# Altium PCB MainPCBV6.PcbDoc (part 1 of 5)
Units mm, origin at the board's own origin, x right, y up, seen from the top; angles counter-clockwise.
Board outline 176 x 144.01 mm, 2 copper layers (Top Layer, Bottom Layer); 232 components, 243 nets, 937 pads, 277 vias.
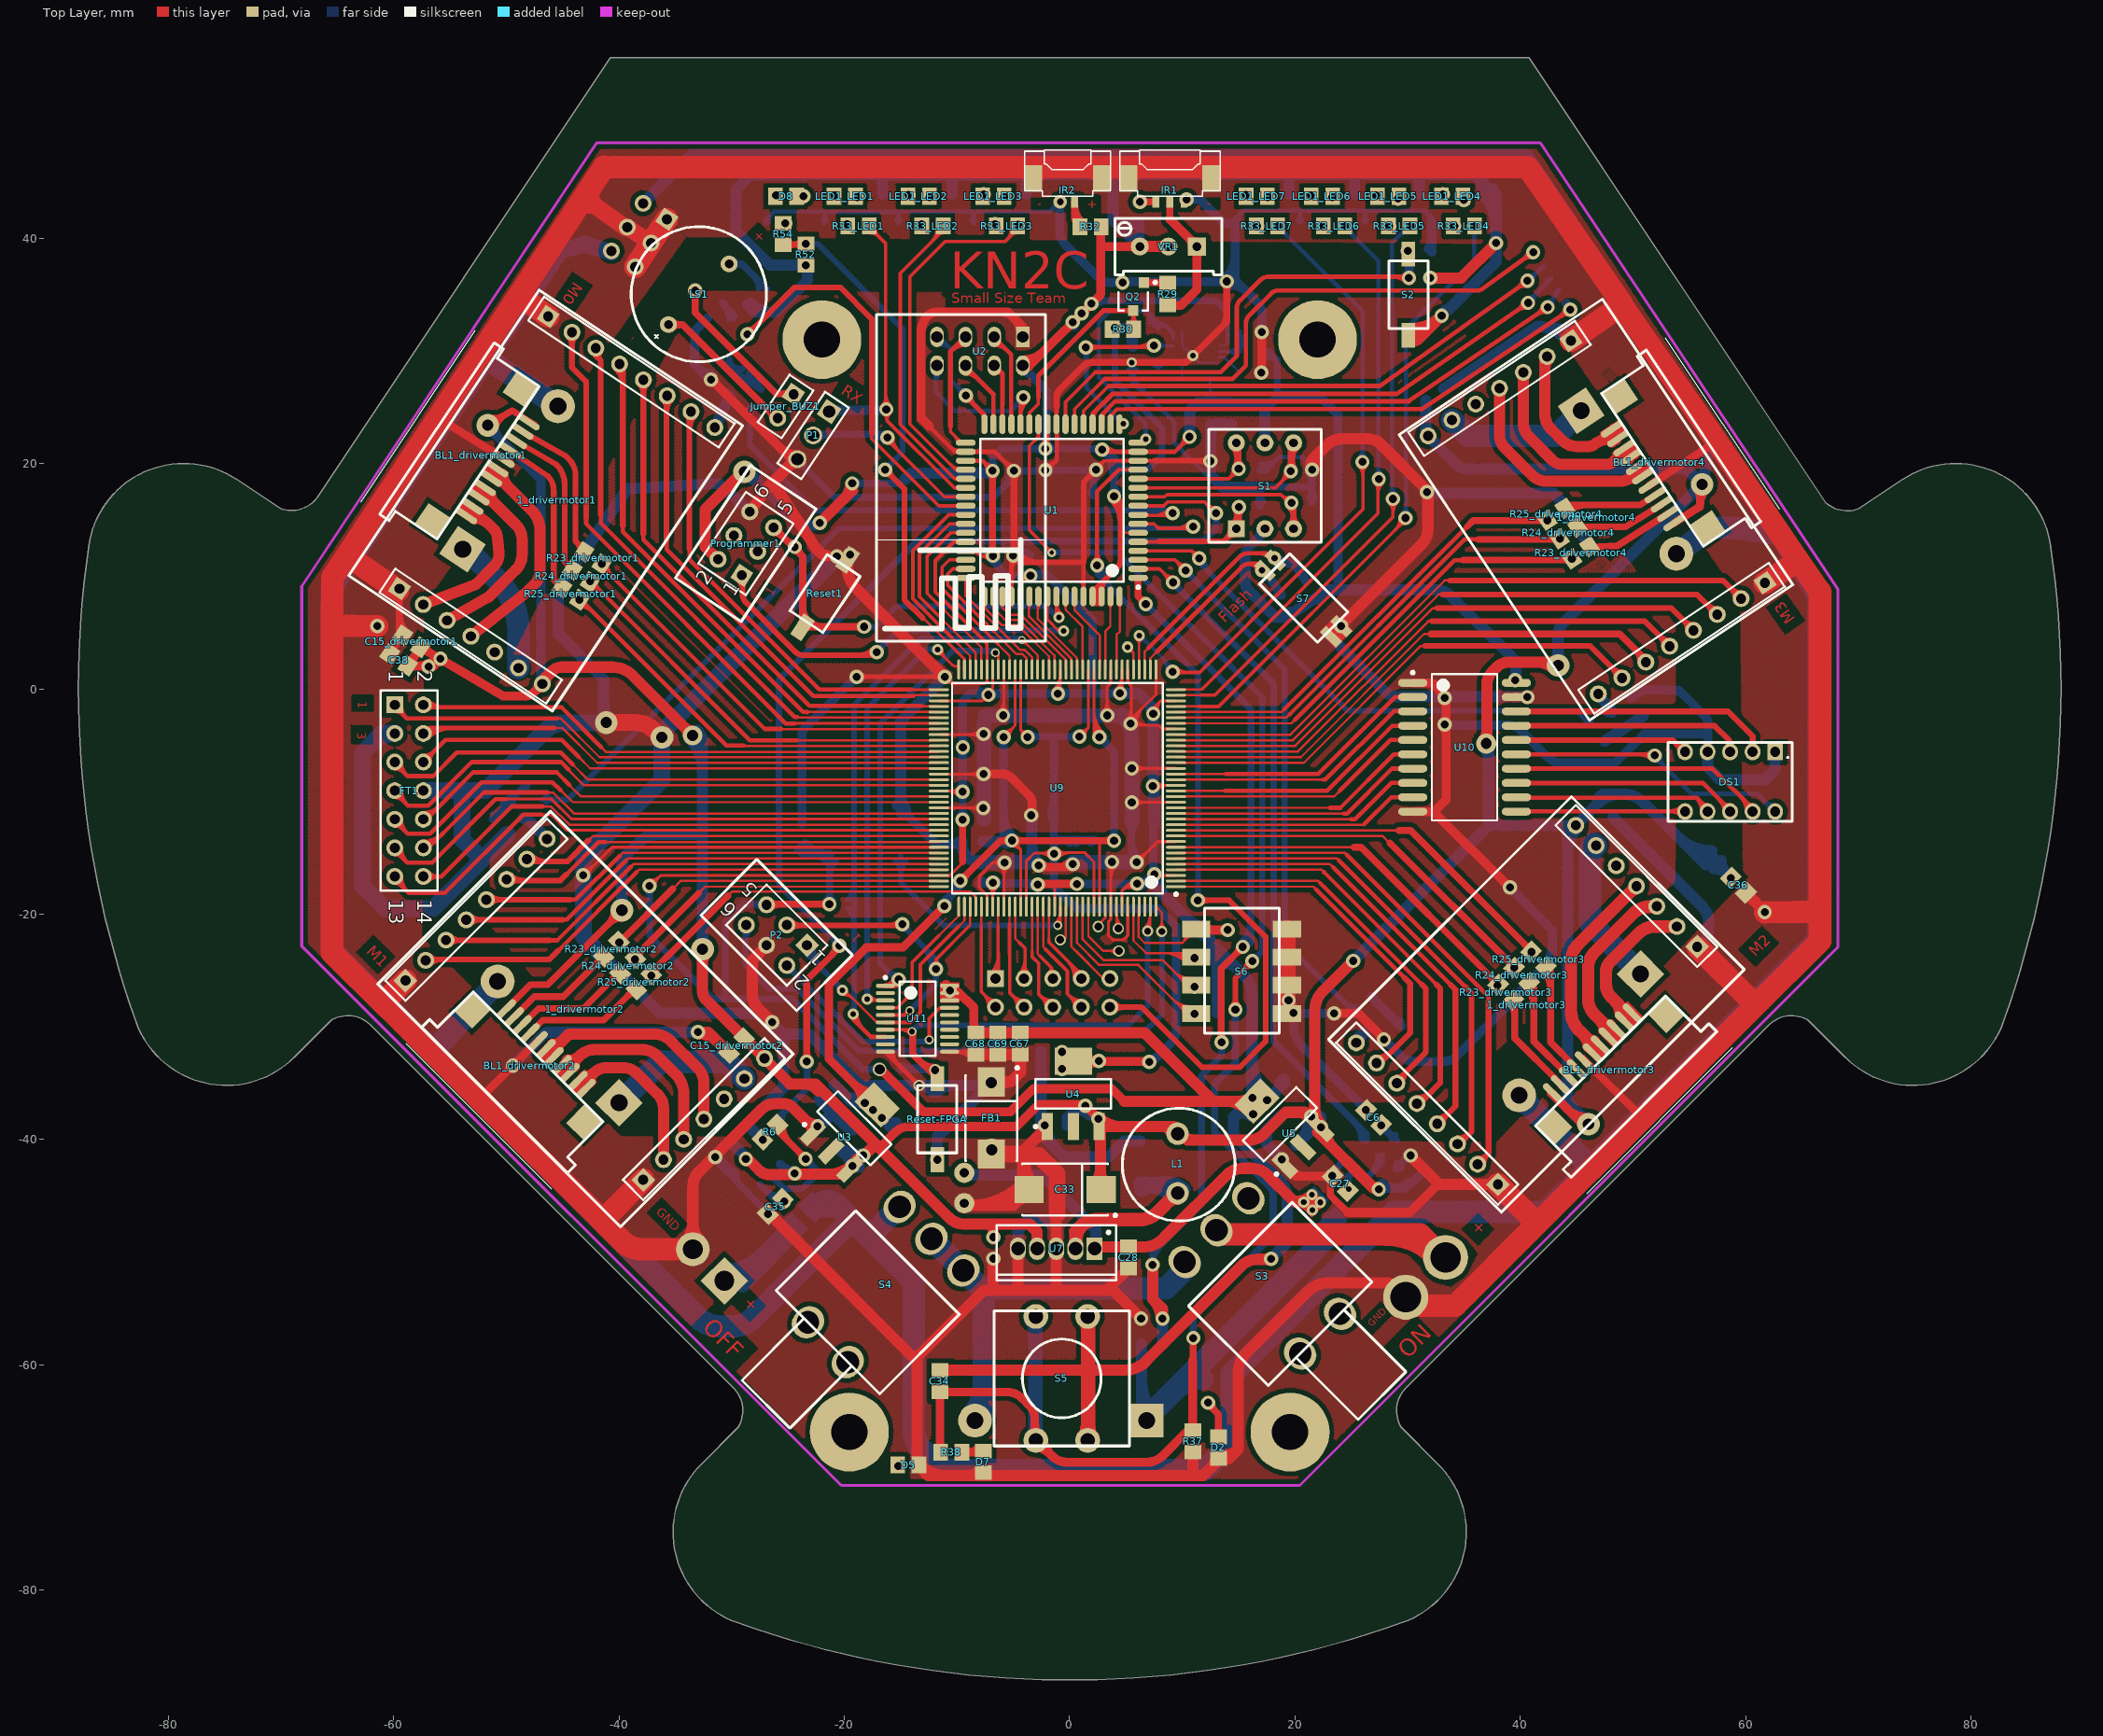
[diagram p0: Top Layer view]
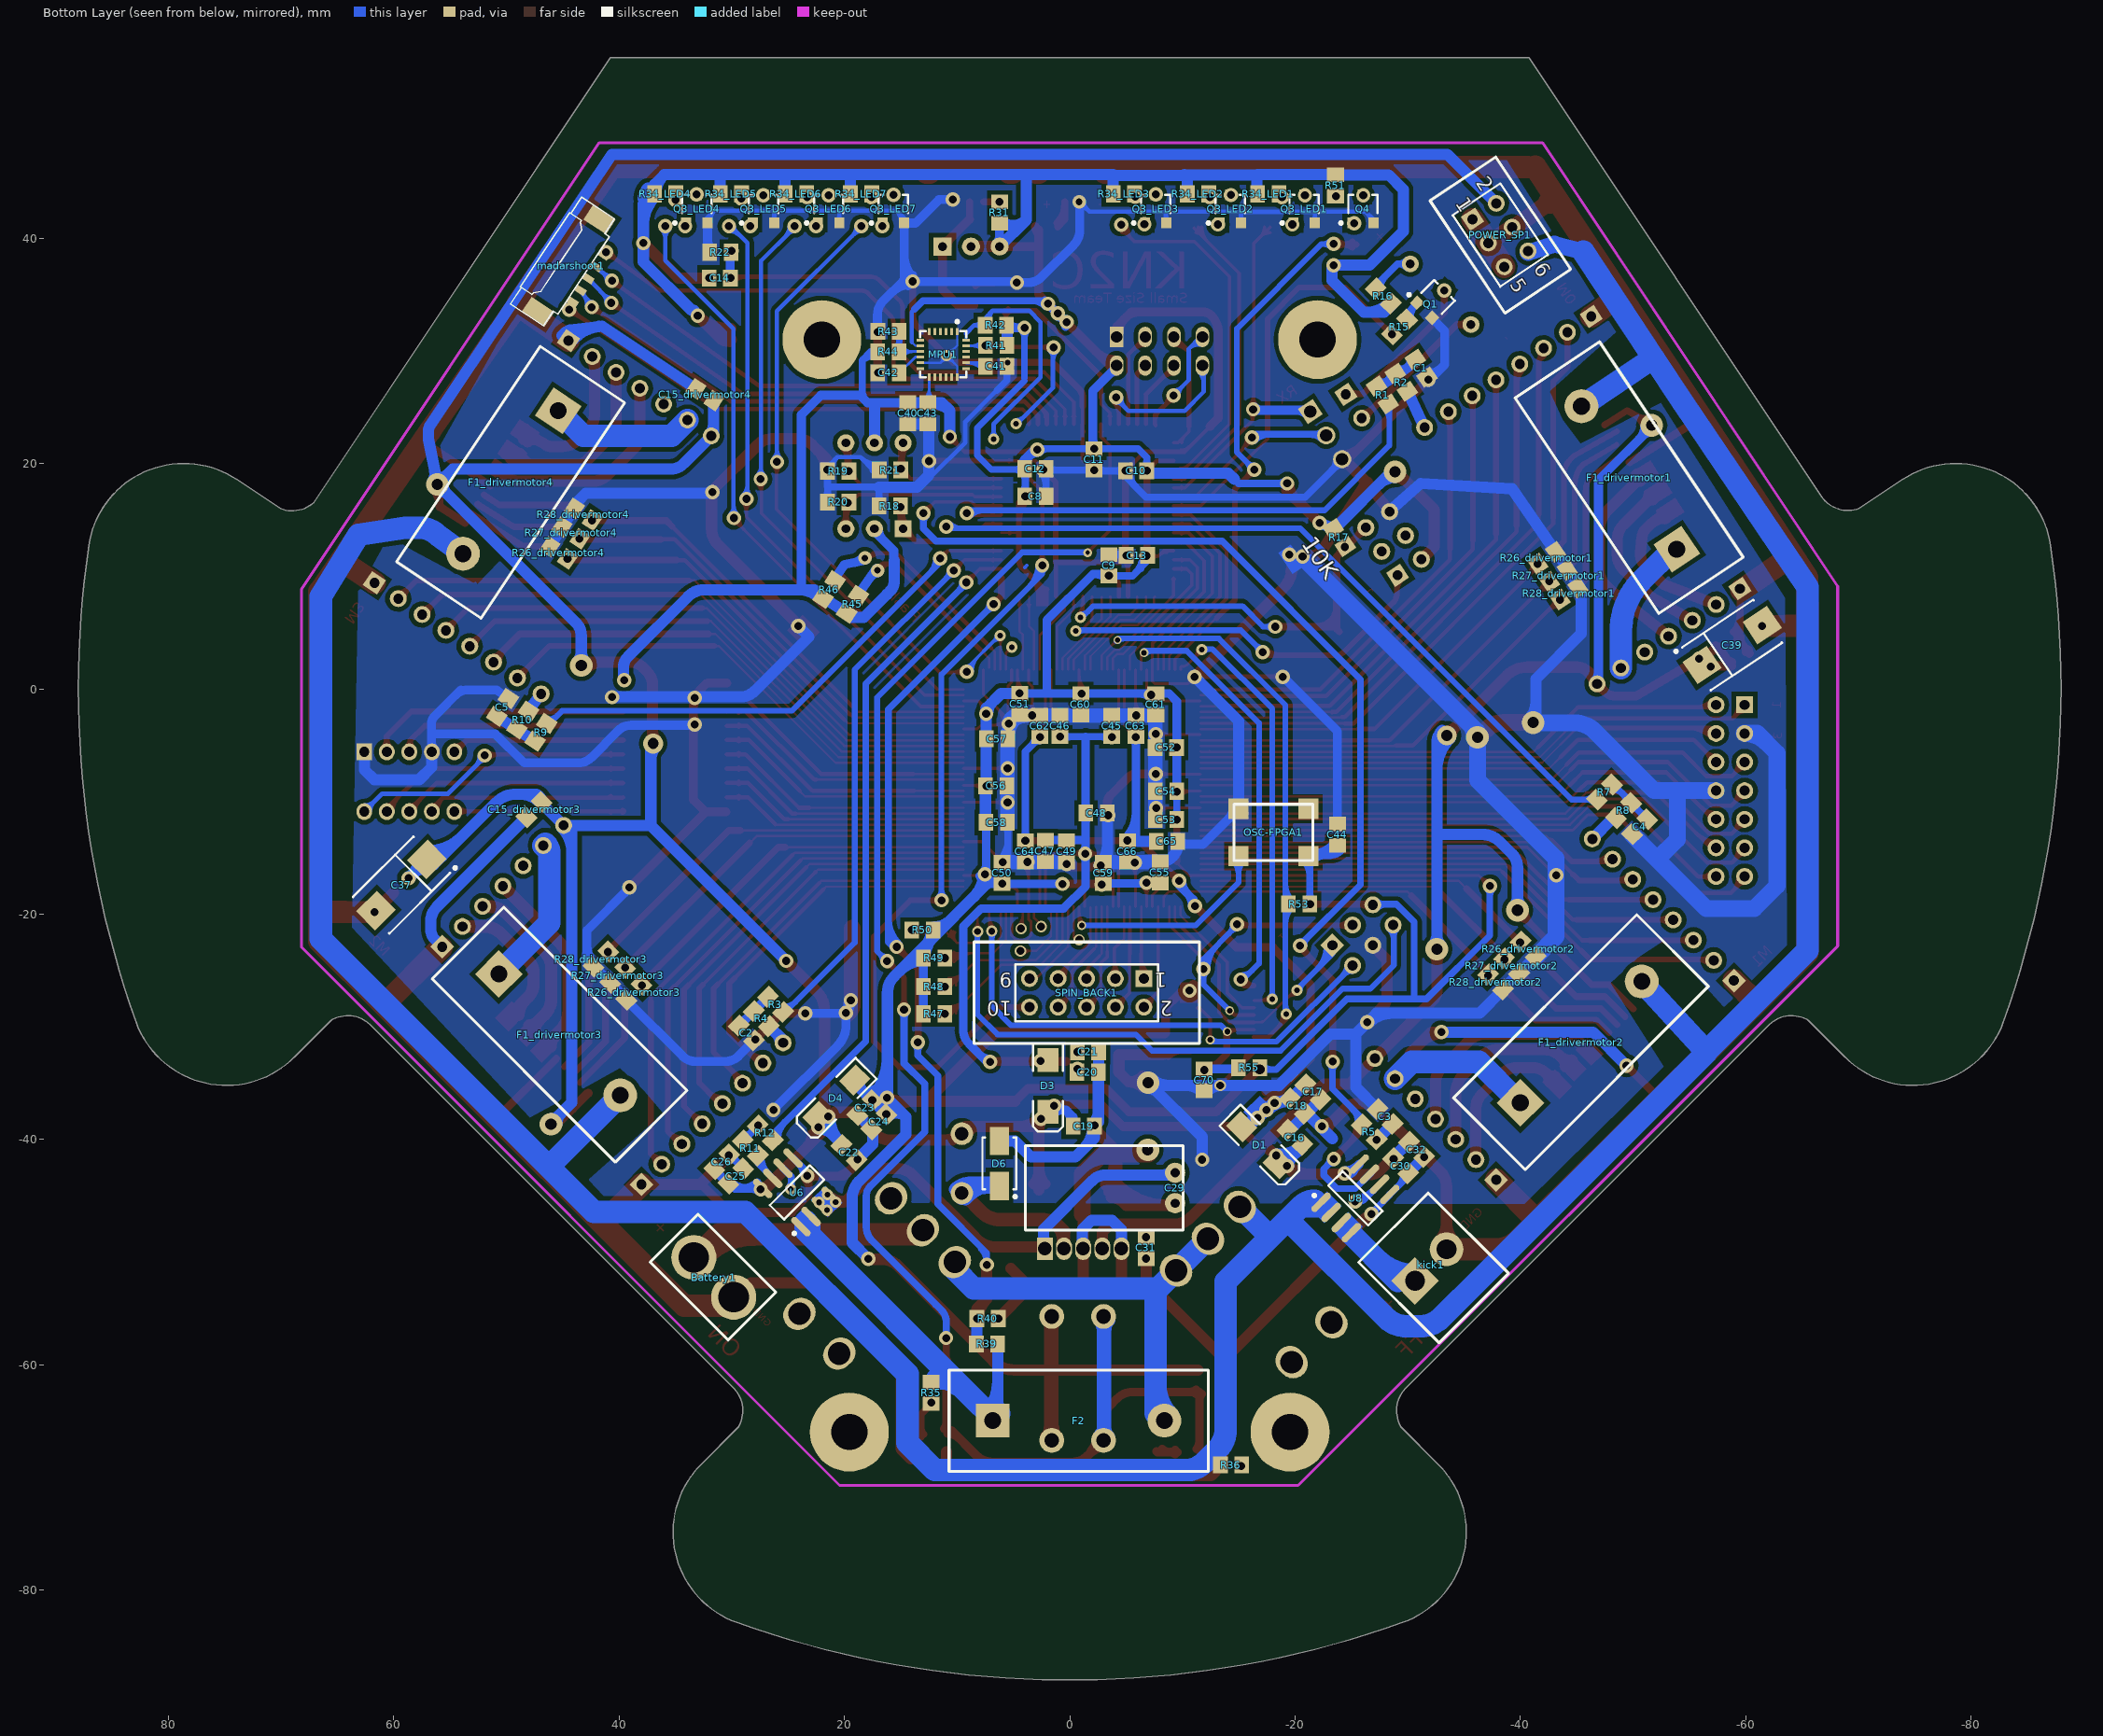
[diagram p1: Bottom Layer view, seen from below]

## Layer stack, top to bottom
Top Layer: signal copper 0.0356
Dielectric: dielectric 0.32, FR-4, Dk 4.8
Bottom Layer: signal copper 0.0356

## Board outline
-62.128,-29.795 -29.795,-62.128 cw(c-31.856,-64.08) -29.44,-65.57 -32.714,-68.845 ccw(c-26.693,-74.867) -29.553,-82.889 ccw(c0,0) 29.554,-82.889 ccw(c26.694,-74.867) 32.715,-68.845 29.44,-65.57 cw(c31.857,-64.08) 29.796,-62.128 62.129,-29.795 cw(c64.081,-31.856) 65.571,-29.44 68.846,-32.714 ccw(c74.868,-26.693) 82.89,-29.553 ccw(c0,0) 87.076,12.724 ccw(c78.649,11.492) 73.925,18.578 70.072,16.009 cw(c69.01,18.642) 67.082,16.558 40.776,56.017 -40.775,56.017 -66.765,17.033 cw(c-69.083,18.671) -70.071,16.009 -73.924,18.578 ccw(c-78.648,11.492) -87.075,12.724 ccw(c0,0) -82.889,-29.553 ccw(c-74.867,-26.693) -68.845,-32.714 -65.57,-29.44 cw(c-64.08,-31.856)

## Design rules (kind name [scope] priority, off if disabled: settings)
Clearance Clearance_4 [InPolygon] p1: gap=0.4
Clearance Clearance_2 [InNamedPolygon('Bottom Layer-No Net')] p2 off: gap=0.254
Clearance Clearance_1 [InNamedPolygon('Bottom Layer-No Net')] p3 off: gap=0.5
Clearance [All] p4: gap=0.2
Clearance Clearance_3 [All] p5 off: gap=0.2
ComponentClearance [All] p1 off: gap=0.254 collisioncheckmode=3 verticalgap=0.254 showdistances=FALSE
FabricationTestPointUsage TestPointUsage [All] p1: valid=0 allowmultiple=FALSE
FabricationTestpoint Testpoint [(IsPad And (OnTopLayer Or OnBottomLayer))] p1: side=3 testpointundercomponent=TRUE minsize=1.016 maxsize=2.54 preferedsize=1.524 minholesize=0 maxholesize=1.016 preferedholesize=0.813 testpointgrid=0.025 allowsidetop=TRUE allowsidebottom=TRUE usegrid=TRUE gridtolerance=0
Height [All] p1 off: minheight=0 maxheight=25.4 prefheight=12.7
HoleSize [All] p1: absolutevalues=TRUE maxlimit=8 minlimit=0.025 maxpercent=80.000 minpercent=20.000
LayerPairs [All] p1 off: enforce=TRUE
MinimumSolderMaskSliver [All] p1 off: minsoldermaskwidth=0.254
NetAntennae [All] p1 off: netantennaetolerance=0
PolygonConnect [All] p1: connectstyle=Direct reliefconductorwidth=0.254 reliefentries=4 polygonreliefangle="90 Angle" airgapwidth=0.254
RoutingVias [All] p1: holewidth=0.5 width=1 viastyle="Through Hole" minholewidth=0.5 minwidth=1 maxholewidth=2 maxwidth=2
SilkToSilkClearance [All] p1 off: silktosilkclearance=0.254
SilkToSolderMaskClearance SilkscreenOverComponentPads [IsPad] p1 off: minsilkscreentomaskgap=0.254 clearancetoexposedcopper=TRUE
SolderMaskExpansion [All] p1: expansion=0.102
Width [All] p1: maxlimit=2 minlimit=0.2 preferedwidth=0.2
18 further rules are at their usual default settings.

## Classes and differential pairs
component class IR: IR1 IR2 Q2 R29 R30 R31 R32 VR1
component class sensor10DOF-S: C40 C41 C42 C43 MPU1 R41 R42 R43 R44
channel class Led: Led1 Led2 Led3
net class LED[1..7]: LED1 LED2 LED3 LED4 LED5 LED6 LED7
component class Power: Battery1 C16 C17 C18 C19 C20 C21 C22 C23 C24 C25 C26 C27 C28 C29 C30 C31 C32 C33 C34 C35 C36 C37 C38 C39 D1 D2 D3 D4 D5 D6 D7 F2 FB1 kick1 L1 POWER_SP1 R35 R36 R37 R38 R39 R40 S3 S4 S5 U3 U4 U5 U6 U7 U8
component class Led3: LED1_LED3 Q3_LED3 R33_LED3 R34_LED3
component class Led2: LED1_LED2 Q3_LED2 R33_LED2 R34_LED2
component class Led1: LED1_LED1 Q3_LED1 R33_LED1 R34_LED1
component class DriverMotor4: 1_drivermotor4 BL1_drivermotor4 C15_drivermotor4 F1_drivermotor4 R23_drivermotor4 R24_drivermotor4 R25_drivermotor4 R26_drivermotor4 R27_drivermotor4 R28_drivermotor4
component class DriverMotor3: 1_drivermotor3 BL1_drivermotor3 C15_drivermotor3 F1_drivermotor3 R23_drivermotor3 R24_drivermotor3 R25_drivermotor3 R26_drivermotor3 R27_drivermotor3 R28_drivermotor3
component class DriverMotor2: 1_drivermotor2 BL1_drivermotor2 C15_drivermotor2 F1_drivermotor2 R23_drivermotor2 R24_drivermotor2 R25_drivermotor2 R26_drivermotor2 R27_drivermotor2 R28_drivermotor2
component class DriverMotor1: 1_drivermotor1 BL1_drivermotor1 C15_drivermotor1 F1_drivermotor1 R23_drivermotor1 R24_drivermotor1 R25_drivermotor1 R26_drivermotor1 R27_drivermotor1 R28_drivermotor1
component class atxmega64: C1 C2 C3 C4 C5 C6 C8 C9 C10 C11 C12 C13 C14 Jumper_BUZ1 LS1 madarshoot1 P1 Programmer1 Q1 R1 R2 R3 R4 R5 R6 R7 R8 R9 R10 R11 R12 R15 R16 R17 R18 R19 R20 R21 R22 Reset1 S1 S2 U1 U2
component class FT245: FT1
component class LED4: LED1_LED4 Q3_LED4 R33_LED4 R34_LED4
component class LED5: LED1_LED5 Q3_LED5 R33_LED5 R34_LED5
component class LED6: LED1_LED6 Q3_LED6 R33_LED6 R34_LED6
component class LED7: LED1_LED7 Q3_LED7 R33_LED7 R34_LED7
component class XC3S400: C44 C45 C46 C47 C48 C49 C50 C51 C52 C53 C54 C55 C56 C57 C58 C59 C60 C61 C62 C63 C64 C65 C66 C67 C68 C69 C70 D8 DS1 O1 OSC-FPGA1 P2 Q4 R45 R46 R47 R48 R49 R50 R51 R52 R53 R54 R55 Reset-FPGA S6 S7 SPIN_BACK1 U9 U10 U11
net class M1N[1..4]: M1N1 M1N2 M1N3 M1N4
net class M1P[1..4]: M1P1 M1P2 M1P3 M1P4
net class M2N[1..4]: M2N1 M2N2 M2N3 M2N4
net class M2P[1..4]: M2P1 M2P2 M2P3 M2P4
net class M3N[1..4]: M3N1 M3N2 M3N3 M3N4
net class M3P[1..4]: M3P1 M3P2 M3P3 M3P4
net class VFB_MOTOR[1..4]: VFB_MOTOR1 VFB_MOTOR2 VFB_MOTOR3 VFB_MOTOR4
channel class drivermotor: drivermotor1 drivermotor2 drivermotor3 drivermotor4

## Components (designator, comment, footprint, x,y, rotation, side; value= is the part's Value field where it differs from the comment)
1_drivermotor1 "Driver Board-FPGA" "DRIVER BOARD-FPGA" -46.507,16.713 r236.31 top (schematic designator 1)
1_drivermotor2 "Driver Board-FPGA" "DRIVER BOARD-FPGA" -42.977,-29.312 r315 top (schematic designator 1)
1_drivermotor3 "Driver Board-FPGA" "DRIVER BOARD-FPGA" 41.427,-28.016 r45 top (schematic designator 1)
1_drivermotor4 "Driver Board-FPGA" "DRIVER BOARD-FPGA" 46.711,15.9 r123.69 top (schematic designator 1)
Battery1 "Header 2B" battery 31.598,-52.248 r135 bottom
BL1_drivermotor1 "BLDC" FLT11 -52.375,20.574 r56.31 top (schematic designator BL1)
BL1_drivermotor2 "BLDC" FLT11 -47.828,-33.299 r135 top (schematic designator BL1)
BL1_drivermotor3 "BLDC" FLT11 47.752,-33.68 r225 top (schematic designator BL1)
BL1_drivermotor4 "BLDC" FLT11 52.476,19.939 r303.69 top (schematic designator BL1)
C1 "Cap_UP" 2012[0805] -31.191,28.473 r56.31 bottom
C2 "Cap_UP" 2012[0805] 28.702,-30.556 r45 bottom
C3 "Cap_UP" 2012[0805] -27.991,-37.973 r225 bottom
C4 "Cap_UP" 2012[0805] -50.597,-12.243 r135 bottom
C5 "Cap_UP" 2012[0805] 50.343,-1.651 r303.69 bottom
C6 "Cap_UP" 2012[0805] 26.975,-38.049 r315 top
C8 "Cap_UP" 2012[0805] 3.048,17.094 r0 bottom
C9 "Cap_UP" 2012[0805] -3.48,10.973 r270 bottom
C10 "Cap_UP" 2012[0805] -5.893,19.355 r180 bottom
C11 "Cap_UP" 2012[0805] -2.159,20.371 r90 bottom
C12 "Cap_UP" 2012[0805] 3.048,19.533 r0 bottom
C13 "Cap_UP" 2012[0805] -5.969,11.836 r180 bottom
C14 "Cap_UP" 2012[0805] 31.064,36.474 r0 bottom
C15_drivermotor1 "Cap_UP" 2012[0805] -58.42,4.216 r326.31 top (schematic designator C15)
C15_drivermotor2 "Cap_UP" 2012[0805] -29.566,-31.674 r45 top (schematic designator C15)
C15_drivermotor3 "Cap_UP" 2012[0805] 47.549,-10.719 r135 bottom (schematic designator C15)
C15_drivermotor4 "Cap_UP" 2012[0805] 32.385,26.111 r213.69 bottom (schematic designator C15)
C16 "Cap_UP" 2012[0805] -19.99,-39.827 r225 bottom
C17 "Cap_UP" 2012[0805] -21.59,-35.789 r45 bottom
C18 "Cap_UP" 2012[0805] -20.193,-37.033 r45 bottom
C19 "Cap_UP" 2012[0805] -1.253,-38.83 r0 bottom
C20 "Cap_UP" 2012[0805] -1.6,-34.036 r0 bottom
C21 "Cap_UP" 2012[0805] -1.626,-32.207 r0 bottom
C22 "Cap_UP" 2012[0805] 19.583,-41.173 r45 bottom
C23 "Cap_UP" 2012[0805] 18.186,-37.186 r135 bottom
C24 "Cap_UP" 2012[0805] 16.942,-38.43 r135 bottom
C25 "Cap_UP" 2012[0805] 29.642,-43.256 r135 bottom
C26 "Cap_UP" 2012[0805] 30.886,-41.986 r315 bottom
C27 "Cap_UP" 2012[0805] 24.028,-43.917 r135 top
C28 "Cap_UP" 2012[0805] 5.232,-50.495 r90 top
C29 "Cap_El" Cap1000u-16 -10.058,-40.564 r0 bottom
C30 "Cap_UP" 2012[0805] -29.388,-42.342 r225 bottom
C31 "Cap_UP" 2012[0805] -6.782,-49.632 r90 bottom
C32 "Cap_UP" 2012[0805] -30.785,-40.894 r45 bottom
C33 "Cap_El" 7343 -0.406,-44.45 r180 top
C34 "Cap_UP" 2012[0805] -11.532,-61.468 r90 top
C35 "Cap_UP" 2012[0805] -26.137,-45.949 r225 top
C36 "Cap_UP" 2012[0805] 59.36,-17.424 r135 top
C37 "Cap_El" 7343 59.324,-17.42 r315 bottom
C38 "Cap_UP" 2012[0805] -59.563,2.565 r326.31 top
C39 "Cap_El" 7343 -58.801,3.886 r146.31 bottom
C40 "100nF" 2012[0805] 14.376,24.46 r270 bottom
C41 "2.2nF" 2012[0805] 6.52,28.635 r0 bottom
C42 "100nF" 2012[0805] 16.104,28.067 r180 bottom
C43 "100nF" 2012[0805] 12.598,24.46 r90 bottom
C44 "Cap_UP" 2012[0805] -23.774,-12.954 r90 bottom
C45 "Cap_UP" 2012[0805] -3.734,-3.302 r270 bottom
C46 "Cap_UP" 2012[0805] 0.864,-3.302 r270 bottom
C47 "Cap_UP" 2012[0805] 2.159,-14.402 r90 bottom
C48 "Cap_UP" 2012[0805] -2.388,-11.024 r0 bottom
C49 "Cap_UP" 2012[0805] 0.279,-14.427 r90 bottom
C50 "Cap_UP" 2012[0805] 5.994,-16.358 r270 bottom
C51 "Cap_UP" 2012[0805] 4.42,-1.346 r90 bottom
C52 "Cap_UP" 2012[0805] -8.534,-5.207 r180 bottom
C53 "Cap_UP" 2012[0805] -8.56,-11.608 r180 bottom
C54 "Cap_UP" 2012[0805] -8.56,-9.093 r180 bottom
C55 "Cap_UP" 2012[0805] -8.026,-16.307 r270 bottom
C56 "Cap_UP" 2012[0805] 6.528,-8.611 r0 bottom
C57 "Cap_UP" 2012[0805] 6.452,-4.445 r0 bottom
C58 "Cap_UP" 2012[0805] 6.477,-11.862 r0 bottom
C59 "Cap_UP" 2012[0805] -2.997,-16.358 r270 bottom
C60 "Cap_UP" 2012[0805] -0.991,-1.372 r90 bottom
C61 "Cap_UP" 2012[0805] -7.645,-1.372 r90 bottom
C62 "Cap_UP" 2012[0805] 2.642,-3.302 r270 bottom
C63 "Cap_UP" 2012[0805] -5.867,-3.302 r270 bottom
C64 "Cap_UP" 2012[0805] 3.937,-14.427 r90 bottom
C65 "Cap_UP" 2012[0805] -8.636,-13.538 r0 bottom
C66 "Cap_UP" 2012[0805] -5.131,-14.427 r90 bottom
C67 "Cap_UP" 2012[0805] -4.394,-31.521 r90 top
C68 "Cap_UP" 2012[0805] -8.331,-31.496 r90 top
C69 "Cap_UP" 2012[0805] -6.375,-31.496 r90 top
C70 "Cap_UP" 2012[0805] -11.938,-34.722 r90 bottom
D1 "BZG03C10" DO214 -16.891,-40.513 r225 bottom
D2 "Diode" 2012[0805] 13.208,-67.361 r270 top
D3 "BZG03C10" DO214 1.93,-35.255 r270 bottom
D4 "BZG03C10" DO214 20.726,-36.347 r315 bottom
D5 "Diode" 2012[0805] -14.326,-68.91 r0 top
D6 "Diode" US1M 6.248,-42.139 r270 bottom
D7 "Diode" 2012[0805] -7.671,-68.631 r270 top
D8 "Diode" 2012[0805] -25.18,43.732 r180 top
DS1 "7Seg Blue-CC" "7Segment Small" 58.623,-8.255 r90 top
F1_drivermotor1 "Fuse" FUSE -49.657,18.745 r236.31 bottom (schematic designator F1)
F1_drivermotor2 "Fuse" FUSE -45.39,-31.369 r315 bottom (schematic designator F1)
F1_drivermotor3 "Fuse" FUSE 45.288,-30.709 r45 bottom (schematic designator F1)
F1_drivermotor4 "Fuse" FUSE 49.632,18.339 r123.69 bottom (schematic designator F1)
F2 "Fuse" FUSE -0.787,-64.973 r0 bottom
FB1 "Ferrite Beed" 7343 -6.96,-38.1 r270 top
FT1 "Header 7X2H" HDR2X7 -59.919,-1.422 r270 top
IR1 "Encoder 1" "SHeader 3" 7.645,43.231 r0 top
IR2 "Header 2" "SHeader 2" -0.813,43.231 r0 top
Jumper_BUZ1 "Header 2" HDR1X2 -24.511,26.137 r236.31 top
kick1 "Header 2B" BHDR1X2 -32.055,-51.156 r45 bottom
L1 "Inductor" inductor 9.576,-42.139 r90 top
LED1_LED1 "Diode" 2012[0805] -19.965,43.732 r180 top (schematic designator LED1)
LED1_LED2 "Diode" 2012[0805] -13.412,43.732 r180 top (schematic designator LED1)
LED1_LED3 "Diode" 2012[0805] -6.776,43.732 r180 top (schematic designator LED1)
LED1_LED4 "Diode" 2012[0805] 33.951,43.732 r180 top (schematic designator LED1)
LED1_LED5 "Diode" 2012[0805] 28.27,43.732 r180 top (schematic designator LED1)
LED1_LED6 "Diode" 2012[0805] 22.39,43.732 r180 top (schematic designator LED1)
LED1_LED7 "Diode" 2012[0805] 16.604,43.732 r180 top (schematic designator LED1)
LS1 "Buzzer" BUZZER -32.928,35.031 r45 top
madarshoot1 "Header 5" "SHEADER 5" 44.12,34.341 r123.69 bottom
MPU1 "MPU6050" QFN_36 11.277,30.624 r0 bottom
OSC-FPGA1 "OSC" OSC_SMD -18.085,-12.751 r270 bottom
P1 "Encoder 1" HDR1X3 -21.361,24.613 r236.31 top
P2 "Header 3X2" HDRBOX2X3 -26.01,-21.869 r135 top
POWER_SP1 "Header 3X2" HDRBOX2X3 -38.227,40.284 r236.31 bottom
Programmer1 "Header 3X2" HDRBOX2X3 -28.753,12.903 r56.31 top
Q1 "2N2222" SOT-23 -32.385,34.493 r225 bottom
Q2 "2N2222" SOT-23 5.639,34.823 r180 top
Q3_LED1 "2N2222" SOT-23 -20.815,42.609 r180 bottom (schematic designator Q3)
Q3_LED2 "2N2222" SOT-23 -14.262,42.609 r180 bottom (schematic designator Q3)
Q3_LED3 "2N2222" SOT-23 -7.635,42.609 r180 bottom (schematic designator Q3)
Q3_LED4 "2N2222" SOT-23 33.101,42.609 r180 bottom (schematic designator Q3)
Q3_LED5 "2N2222" SOT-23 27.178,42.609 r180 bottom (schematic designator Q3)
Q3_LED6 "2N2222" SOT-23 21.4,42.609 r180 bottom (schematic designator Q3)
Q3_LED7 "2N2222" SOT-23 15.651,42.609 r180 bottom (schematic designator Q3)
Q4 "2N2222" SOT-23 -26.03,42.609 r180 bottom
R1 "Res" 2012[0805] -27.762,26.086 r56.31 bottom
R2 "Res" 2012[0805] -29.439,27.203 r236.31 bottom
R3 "Res" 2012[0805] 26.111,-28.016 r45 bottom
R4 "Res" 2012[0805] 27.381,-29.286 r225 bottom
R5 "Res" 2012[0805] -26.586,-39.337 r225 bottom
R6 "Res" 2012[0805] -26.604,-39.355 r45 top
R7 "Res" 2012[0805] -47.473,-9.169 r135 bottom
R8 "Res" 2012[0805] -49.174,-10.795 r315 bottom
R9 "Res" 2012[0805] 46.939,-3.861 r303.69 bottom
R10 "Res" 2012[0805] 48.565,-2.769 r123.69 bottom
R11 "Res" 2012[0805] 28.346,-40.767 r225 bottom
R12 "Res" 2012[0805] 27.026,-39.421 r45 bottom
R15 "Res" 2012[0805] -29.286,32.131 r135 bottom
R16 "Res" 2012[0805] -27.838,34.874 r45 bottom
R17 "10K" 2012[0805] -23.927,13.437 r236.31 bottom
R18 "Res" 2012[0805] 15.977,16.231 r180 bottom
R19 "Res" 2012[0805] 20.549,19.329 r180 bottom
R20 "Res" 2012[0805] 20.549,16.586 r180 bottom
R21 "Res" 2012[0805] 15.951,19.431 r180 bottom
R22 "Res" 2012[0805] 31.013,38.76 r0 bottom
R23_drivermotor1 "Res" 2012[0805] -42.321,11.619 r146.31 top (schematic designator R23)
R23_drivermotor2 "Res" 2012[0805] -40.688,-23.107 r225 top (schematic designator R23)
R23_drivermotor3 "Res" 2012[0805] 38.7,-26.939 r315 top (schematic designator R23)
R23_drivermotor4 "Res" 2012[0805] 45.369,12.077 r33.69 top (schematic designator R23)
R24_drivermotor1 "Res" 2012[0805] -43.362,10.019 r146.31 top (schematic designator R24)
R24_drivermotor2 "Res" 2012[0805] -39.228,-24.592 r225 top (schematic designator R24)
R24_drivermotor3 "Res" 2012[0805] 40.115,-25.433 r315 top (schematic designator R24)
R24_drivermotor4 "Res" 2012[0805] 44.272,13.843 r33.69 top (schematic designator R24)
R25_drivermotor1 "Res" 2012[0805] -44.302,8.444 r146.31 top (schematic designator R25)
R25_drivermotor2 "Res" 2012[0805] -37.808,-26.022 r225 top (schematic designator R25)
R25_drivermotor3 "Res" 2012[0805] 41.618,-23.999 r315 top (schematic designator R25)
R25_drivermotor4 "Res" 2012[0805] 43.185,15.506 r33.69 top (schematic designator R25)
R26_drivermotor1 "Res" 2012[0805] -42.342,11.633 r326.31 bottom (schematic designator R26)
R26_drivermotor2 "Res" 2012[0805] -40.688,-23.107 r45 bottom (schematic designator R26)
R26_drivermotor3 "Res" 2012[0805] 38.692,-26.931 r135 bottom (schematic designator R26)
R26_drivermotor4 "Res" 2012[0805] 45.369,12.077 r213.69 bottom (schematic designator R26)
R27_drivermotor1 "Res" 2012[0805] -43.383,10.033 r326.31 bottom (schematic designator R27)
R27_drivermotor2 "Res" 2012[0805] -39.228,-24.592 r45 bottom (schematic designator R27)
R27_drivermotor3 "Res" 2012[0805] 40.124,-25.443 r135 bottom (schematic designator R27)
R27_drivermotor4 "Res" 2012[0805] 44.272,13.843 r213.69 bottom (schematic designator R27)
R28_drivermotor1 "Res" 2012[0805] -44.323,8.458 r326.31 bottom (schematic designator R28)
R28_drivermotor2 "Res" 2012[0805] -37.808,-26.022 r45 bottom (schematic designator R28)
R28_drivermotor3 "Res" 2012[0805] 41.618,-23.999 r135 bottom (schematic designator R28)
R28_drivermotor4 "Res" 2012[0805] 43.18,15.494 r213.69 bottom (schematic designator R28)
R29 "Res" 2012[0805] 8.712,35.052 r270 top
R30 "Res" 2012[0805] 4.724,31.928 r0 top
R31 "Res" 2012[0805] 6.223,42.291 r90 bottom
R32 "Res" 2012[0805] 1.854,41.021 r180 top
R33_LED1 "Res" 2012[0805] -18.74,41.091 r180 top (schematic designator R33)
R33_LED2 "Res" 2012[0805] -12.179,41.091 r180 top (schematic designator R33)
R33_LED3 "Res" 2012[0805] -5.575,41.091 r180 top (schematic designator R33)
R33_LED4 "Res" 2012[0805] 34.981,41.091 r180 top (schematic designator R33)
R33_LED5 "Res" 2012[0805] 29.253,41.091 r180 top (schematic designator R33)
R33_LED6 "Res" 2012[0805] 23.475,41.091 r180 top (schematic designator R33)
R33_LED7 "Res" 2012[0805] 17.518,41.091 r180 top (schematic designator R33)
R34_LED1 "Res" 2012[0805] -17.628,43.942 r0 bottom (schematic designator R34)
R34_LED2 "Res" 2012[0805] -11.392,43.942 r0 bottom (schematic designator R34)
R34_LED3 "Res" 2012[0805] -4.816,43.942 r0 bottom (schematic designator R34)
R34_LED4 "Res" 2012[0805] 35.916,43.942 r0 bottom (schematic designator R34)
R34_LED5 "Res" 2012[0805] 30.074,43.942 r0 bottom (schematic designator R34)
R34_LED6 "Res" 2012[0805] 24.308,43.942 r0 bottom (schematic designator R34)
R34_LED7 "Res" 2012[0805] 18.517,43.942 r0 bottom (schematic designator R34)
R35 "Res" 2012[0805] 12.294,-62.509 r90 bottom
R36 "Res" 2012[0805] -14.326,-68.91 r0 bottom
R37 "Res" 2012[0805] 10.947,-66.802 r90 top
R38 "Res" 2012[0805] -10.516,-67.767 r180 top
R39 "Res" 2012[0805] 7.341,-58.166 r180 bottom
R40 "Res" 2012[0805] 7.29,-55.905 r0 bottom
R41 "4K7" 2012[0805] 6.528,30.48 r0 bottom
R42 "4K7" 2012[0805] 6.553,32.283 r0 bottom
R43 "1K-JSEL-MPU-MODE" 2012[0805] 16.086,31.725 r0 bottom
R44 "1K-JSEL-MPU-MODE" 2012[0805] 16.103,29.925 r180 bottom
R45 "Res" 2012[0805] 19.279,7.518 r303.69 bottom
R46 "Res" 2012[0805] 21.361,8.814 r303.69 bottom
R47 "Res" 2012[0805] 12.04,-28.854 r0 bottom
R48 "Res" 2012[0805] 12.04,-26.441 r0 bottom
R49 "Res" 2012[0805] 12.04,-23.901 r0 bottom
R50 "Res" 2012[0805] 13.081,-21.412 r180 bottom
R51 "Res" 2012[0805] -23.597,44.679 r90 bottom
R52 "Res" 2012[0805] -23.419,38.557 r270 top
R53 "Res" 2012[0805] -20.371,-19.101 r180 bottom
R54 "Res" 2012[0805] -25.425,40.386 r90 top
R55 "Res" 2012[0805] -15.926,-33.63 r180 bottom
Reset1 "SW-SPST" pushbutton_smd -21.717,8.458 r146.31 top
Reset-FPGA "SW-SPST" pushbutton_smd -11.76,-38.202 r0 top
S1 "SW-Hex" SW-HEX 17.331,18.022 r0 top
S2 "SW-SPST" pushbutton_smd 30.074,35.001 r180 top
S3 "SW-SPDT" "PCBComponent_1 - duplicate2" 18.644,-54.432 r0 top locked
S4 "SW-SPDT" "PCBComponent_1 - duplicate2" -18.644,-54.432 r270 top
S5 "SW-SPST" "push button B" -6.731,-55.22 r270 top locked
S6 "SW DIP-4" SW_NUM_4PIN 13.767,-25.07 r90 top
S7 "SW DIP-2" SW_NUM_2PIN 20.726,8.026 r45 top
SPIN_BACK1 "Header 5X2" HDRBOX2X5 -1.524,-26.975 r0 bottom
U1 "ATxmega64A3-AU" 64A_N -1.575,15.85 r180 top
U2 "nrf24L01" NRF24L01 -4.166,31.242 r270 top
U3 "LM1117DT-1.2" SOT223 -19.126,-38.998 r45 top
U4 "LM1117DT-2.5" SOT223 0.322,-35.966 r90 top
U5 "LM1117DT-3.3" SOT223 18.671,-38.661 r135 top
U6 "ACS712" "8 pin SOIC_N" 24.211,-44.704 r45 bottom
U7 "LM2576HVT-5.0" T05A -1.194,-49.708 r180 top
U8 "ACS712" "8 pin SOIC_N" -25.359,-45.238 r135 bottom
U9 "XC3S400-4TQ144C" TQ144_L -1.092,-8.814 r180 top
U10 "74ACT541SC" M20B_M 35.052,-5.182 r0 top
U11 "XCF04SVO20C" VO20_N -13.513,-29.286 r0 top
VR1 "Res Tap" MULTITURN 8.763,39.268 r180 top

## Footprints (in the part's own frame and the unit in brackets; to place one, negate y for a bottom-side part, rotate by r counter-clockwise, add the part's x,y. Pads: shape width x height; smd on the part's side, far side on the other; paste and mask are expansions set on the pad)
"7Segment Small" [mm]
  rect 1.5x1.4 hole 0.9: 1(2.65,-4)
  oval 1.5x1.4 hole 0.9: 2(2.65,-2) 3(2.65,0) 4(2.65,2) 5(2.65,4) 6(-2.65,4) 7(-2.65,2) 8(-2.65,0) 9(-2.65,-2) 10(-2.65,-4)
  silkscreen extent -3.5,-5.5 3.5,5.5, body extent -3.54,-5.48 3.5,5.55, height 4.8
"8 pin SOIC_N" [mm] "8-Pin Small Outline Integrated Circuit 1.27 mm Pitch, IPC Medium Density"
  oval 2.2x0.6 smd: 1(-2.4,1.905) 2(-2.4,0.635) 3(-2.4,-0.635) 4(-2.4,-1.905) 5(2.4,-1.905) 6(2.4,-0.635) 7(2.4,0.635) 8(2.4,1.905)
  silkscreen extent -2.52,-2.5 0.9,2.88, body extent -1.95,-2.45 1.95,2.45, height 1.91
64A_N [mm] "Thin QFP, 64-Leads, Body 14x14mm, Pitch 0.8mm, IPC Medium Density"
  oval 1.75x0.55 smd: 1(-7.65,6) 2(-7.65,5.2) 3(-7.65,4.4) 4(-7.65,3.6) 5(-7.65,2.8) 6(-7.65,2) 7(-7.65,1.2) 8(-7.65,0.4) 9(-7.65,-0.4) 10(-7.65,-1.2) 11(-7.65,-2) 12(-7.65,-2.8) 13(-7.65,-3.6) 14(-7.65,-4.4) 15(-7.65,-5.2) 16(-7.65,-6) 33(7.65,-6) 34(7.65,-5.2) 35(7.65,-4.4) 36(7.65,-3.6) 37(7.65,-2.8) 38(7.65,-2) 39(7.65,-1.2) 40(7.65,-0.4) 41(7.65,0.4) 42(7.65,1.2) 43(7.65,2) 44(7.65,2.8) 45(7.65,3.6) 46(7.65,4.4) 47(7.65,5.2) 48(7.65,6)
  oval 0.55x1.75 smd: 17(-6,-7.65) 18(-5.2,-7.65) 19(-4.4,-7.65) 20(-3.6,-7.65) 21(-2.8,-7.65) 22(-2,-7.65) 23(-1.2,-7.65) 24(-0.4,-7.65) 25(0.4,-7.65) 26(1.2,-7.65) 27(2,-7.65) 28(2.8,-7.65) 29(3.6,-7.65) 30(4.4,-7.65) 31(5.2,-7.65) 32(6,-7.65) 49(6,7.65) 50(5.2,7.65) 51(4.4,7.65) 52(3.6,7.65) 53(2.8,7.65) 54(2,7.65) 55(1.2,7.65) 56(0.4,7.65) 57(-0.4,7.65) 58(-1.2,7.65) 59(-2,7.65) 60(-2.8,7.65) 61(-3.6,7.65) 62(-4.4,7.65) 63(-5.2,7.65) 64(-6,7.65)
  silkscreen extent -7.78,-6.35 6.35,6.95, body extent -7,-7 7,7, height 1.2
2012[0805] [mm] "Chip Resistor; Body 2.0 x 1.3 mm (LxW typ)"
  rect 1.3x1.5 smd: 1(-0.95,0) 2(0.95,0)
  body extent -1.22,-0.75 1.28,0.75, height 0.5
7343 [mm] "Capacitor, SM Tantalum; Body 7.3 x 4.3 mm (LxW typ)"
  rect 2.6x2.4 smd: 1(-3.2,0) 2(3.2,0)
  silkscreen extent -4.58,-2.3 3.8,2.42, body extent -3.9,-2.4 3.9,2.4, height 2
battery [mm]
  round 4 hole 2.7: 1(0,2.5) 2(0,-2.5)
  silkscreen extent -3.04,-4.83 2.96,4.95
BHDR1X2 [mm]
  rect 3x3 hole 1.75: 1(0,1.98)
  round 3 hole 1.75: 2(0,-1.98)
  silkscreen extent -5.4,-4.36 4.7,4.36, body extent -5.53,-4.47 4.77,4.47, height 12.5
BUZZER [mm]
  round 1.5 hole 0.8: 1(-3.81,0) 2(3.81,0)
  silkscreen extent -6,-6 6,6, body extent -5.98,-6 5.97,5.97, height 9.3
Cap1000u-16 [mm]
  round 1.8 hole 0.8: 1(0.7,2.4) 2(0.7,5.1)
  silkscreen extent 0,0 14,7.5
DO214 [mm] "DO-214-AC/SMA; 2 C-Bend Leads; Body 5.3 x 2.6 mm, inc. leads (LxW)"
  rect 2.1x1.85 smd: 1(-2.3,0) 2(2.3,0)
  silkscreen extent -3.75,-1.33 4.05,1.33
"DRIVER BOARD-FPGA" [mm]
  round 1.5 hole 0.9: 1(-13.716,8.89) 2(-13.716,6.35) 3(-13.716,3.81) 4(-13.716,1.27) 5(-13.716,-1.27) 6(-13.716,-3.81) 7(-13.716,-6.35) 9(13.716,8.763) 10(13.716,6.223) 11(13.716,3.683) 12(13.716,1.143) 13(13.716,-1.397) 14(13.716,-3.937)
  rect 1.5x1.5 hole 0.9: 8(-13.716,-8.89) 15(13.716,-6.477)
  silkscreen extent -15.24,-10.86 15.24,10.84
FLT11 [mm]
  rect 2.2x2.4 smd: 0(-7,0.3) 0(7,0.3)
  oval 0.6x2.2 smd: 1(-5,-1.9) 2(-4,-1.9) 3(-3,-1.9) 4(-2,-1.9) 5(-1,-1.9) 6(0,-1.9) 7(1,-1.9) 8(2,-1.9) 9(3,-1.9) 10(4,-1.9) 11(5,-1.9)
  silkscreen extent -9.15,-0.9 9.15,6.56, body extent -9.15,-0.9 9.15,4.6, height 3
FUSE [mm]
  rect 3x3 hole 1.5: 1(7.62,0)
  round 3 hole 1.5: 2(-7.62,0)
  silkscreen extent -11.5,-4.5 11.5,4.5, body extent -11.6,-4.65 11.63,4.62, height 4
HDR1X2 [mm] "Connector; Header; 2 Position"
  rect 1.5x1.5 hole 0.9: 1(0,0)
  round 1.5 hole 0.9: 2(2.54,0)
  silkscreen extent -1.27,-1.27 3.81,1.27, body extent -1.38,-1.38 3.9,1.38, height 4
HDR1X3 [mm] "Connector; Header; 3 Position"
  rect 1.6x1.6 hole 1.1: 1(0,0)
  round 1.6 hole 1.1: 2(2.54,0) 3(5.08,0)
  silkscreen extent -1.27,-1.27 6.35,1.27
HDR2X7 [mm]
  rect 1.5x1.5 hole 0.9: 1(0,0)
  round 1.5 hole 0.9: 2(0,2.54) 3(2.54,0) 4(2.54,2.54) 5(5.08,0) 6(5.08,2.54) 7(7.62,0) 8(7.62,2.54) 9(10.16,0) 10(10.16,2.54) 11(12.7,0) 12(12.7,2.54) 13(15.24,0) 14(15.24,2.54)
  silkscreen extent -1.27,-1.27 16.51,3.81
HDRBOX2X3 [mm]
  rect 1.5x1.5 hole 0.9: 1(-2.54,-1.27)
  round 1.5 hole 0.9: 2(-2.54,1.27) 3(0,-1.27) 4(0,1.27) 5(2.54,-1.27) 6(2.54,1.27)
  silkscreen extent -6,-3.5 6,3.5, body extent -6,-3.52 6,3.47, height 4
HDRBOX2X5 [mm]
  rect 1.5x1.5 hole 0.9: 1(-5.062,-1.254)
  round 1.5 hole 0.9: 2(-5.062,1.286) 3(-2.522,-1.254) 4(-2.522,1.286) 5(0.018,-1.254) 6(0.018,1.286) 7(2.558,-1.254) 8(2.558,1.286) 9(5.098,-1.254) 10(5.098,1.286)
  silkscreen extent -10,-4.5 10,4.5, body extent -10.02,-4.52 -9.97,4.45, height 4
inductor [mm]
  round 2 hole 1.2: 1(-2.64,0) 2(2.64,0)
  silkscreen extent -5.11,-5.11 4.91,4.9
M20B_M [mm] "SOIC, 20-Leads, Body 12.8x7.5mm, Pitch 1.27mm, IPC Low Density"
  oval 2.6x0.7 smd: 1(-4.6,5.715) 2(-4.6,4.445) 3(-4.6,3.175) 4(-4.6,1.905) 5(-4.6,0.635) 6(-4.6,-0.635) 7(-4.6,-1.905) 8(-4.6,-3.175) 9(-4.6,-4.445) 10(-4.6,-5.715) 11(4.6,-5.715) 12(4.6,-4.445) 13(4.6,-3.175) 14(4.6,-1.905) 15(4.6,-0.635) 16(4.6,0.635) 17(4.6,1.905) 18(4.6,3.175) 19(4.6,4.445) 20(4.6,5.715)
  silkscreen extent -4.72,-6.5 2.9,6.74, body extent -3.75,-6.5 3.75,6.5, height 2.6
MULTITURN [mm]
  rect 1.6x1.6 hole 0.8: 1(-2.54,0)
  round 1.6 hole 0.8: 2(0,0) 3(2.54,0)
  silkscreen extent -4.75,-2.5 4.75,2.5, body extent -4.77,-2.5 4.72,2.53, height 4
NRF24L01 [mm]
  rect 1.8x1.2 hole 1: 1(0,0)
  oval 1.8x1.2 hole 1: 2(2.54,0) 3(0,-2.54) 4(2.54,-2.54) 5(0,-5.08) 6(2.54,-5.08) 7(0,-7.62) 8(2.54,-7.62)
  silkscreen extent -2,-13 27,2
OSC_SMD [mm]
  rect 1.8x1.8 smd: 1(-2.1,3.1) 2(-2.1,-3.1) 3(2.1,-3.1) 4(2.1,3.1)
  silkscreen extent -2.5,-3.5 2.5,3.5
"PCBComponent_1 - duplicate2" [mm]
  oval 3x2.6 hole 2 rot 135: 0(1.811,-4.589) 0(5.347,-1.054) 1(-8.442,3.542) 2(-5.613,6.371) 3(-2.785,9.199)
  silkscreen extent -8.09,-10.45 11.2,8.85, body extent -8.07,-10.21 11.25,8.81, height 8
"push button B" [mm]
  round 2.2 hole 1.3: 1(0.5,3.724) 1(11.5,3.724) 2(0.5,8.324) 2(11.5,8.324)
  silkscreen extent 0,0.02 12,12.02
pushbutton_smd [mm]
  rect 1.2x2.2 smd: 1(0,-3.6) 2(0,3.6)
  silkscreen extent -1.75,-3 1.75,3, body extent -1.75,-3 1.73,2.97, height 4
QFN_36 [mm]
  rect 0.25x0.65 smd: 1(-1.292,-1.094) 2(-0.792,-1.094) 3(-0.292,-1.094) 4(0.208,-1.094) 5(0.708,-1.094) 6(1.208,-1.094) 13(1.208,2.956) 14(0.708,2.956) 15(0.208,2.956) 16(-0.292,2.956) 17(-0.792,2.956) 18(-1.292,2.956)
  rect 0.65x0.25 smd: 7(1.983,-0.319) 8(1.983,0.181) 9(1.983,0.681) 10(1.983,1.181) 11(1.983,1.681) 12(1.983,2.181) 19(-2.067,2.181) 20(-2.067,1.681) 21(-2.067,1.181) 22(-2.067,0.681) 23(-2.067,0.181) 24(-2.067,-0.319)
  silkscreen extent -2.09,-2.09 2.01,2.98, body extent -2.09,-1.12 2.01,2.98, height 0.95
"SHeader 2" [mm]
  rect 1.6x2.4 smd: 0(-2.425,2.075) 0(3.675,2.075)
  rect 0.6x1 smd: 1(0,0) 2(1.25,0)
  silkscreen extent -3.2,0.5 4.45,4.62, body extent -3.2,-0.12 4.45,4.65, height 3.5
"SHeader 3" [mm]
  rect 1.6x2.4 smd: 0(-2.425,2.075) 0(4.925,2.075)
  rect 0.6x1 smd: 1(0,0) 2(1.25,0) 3(2.5,0)
  silkscreen extent -3.2,0.5 5.7,4.62, body extent -3.2,-0.12 5.7,4.65, height 3.5
"SHEADER 5" [mm] "SMD Header 1.27mm"
  rect 1.6x2.4 smd: 0(-2.425,2.075) 0(7.425,2.075)
  rect 0.6x1 smd: 1(0,0) 2(1.25,0) 3(2.5,0) 4(3.75,0) 5(5,0)
  silkscreen extent -3.2,0.5 8.2,4.62, body extent -3.2,-0.12 8.2,4.65, height 3.5
SOT223 [mm] "SOT223, 4-Leads, Body 6.7x7.3mm (max), Pitch 2.30mm, IPC Medium Density"
  rect 2.4x1 smd: 1(-2.9,2.3) 2(-2.9,0) 3(-2.9,-2.3)
  rect 2.4x3.3 smd: 4(2.9,0)
  silkscreen extent -3.02,-3.35 1.3,3.47, body extent -1.85,-3.35 1.85,3.35, height 1.8
SOT-23 [mm] "SOT-23; 3 Leads; Body 3.0 x 2.6 mm, inc. leads (LxW max)"
  rect 0.9x0.95 smd: 1(0,1.25) 2(-0.95,-1.25) 3(0.95,-1.25)
  silkscreen extent -2.07,-1.37 1.3,1.25, body extent -1.33,-0.37 1.33,1.25, height 2
SW-HEX [mil]
  rect 60x60 hole 30: 1(-100,-150)
  round 60 hole 30: 2(0,-150) 3(100,-150) 4(100,150) 5(0,150) 6(-100,150)
  silkscreen extent -197,-197 197,197, body extent -198,-199 195,197, height 79
SW_NUM_2PIN [mm]
  rect 0.8x2 smd: 1(-0.65,-4.15) 2(0.65,-4.15) 3(0.65,4.15) 4(-0.65,4.15)
  silkscreen extent -1.85,-3.65 1.95,3.65
SW_NUM_4PIN [mm]
  rect 1.5x2.5 smd: 1(-3.75,-5.525) 2(-1.25,-5.525) 3(1.25,-5.525) 4(3.75,-5.525) 5(3.75,2.525) 6(1.25,2.525) 7(-1.25,2.525) 8(-3.75,2.525)
  silkscreen extent -5.5,-4.82 5.6,1.79
T05A [mm] "TO, Thru-Hole, Vertical, Heatsink Mounted; 5 In-Line Leads; Pitch 1.70 mm"
  rect 1.4x2 hole 1.2: 1(-3.4,0)
  oval 1.4x2 hole 1.2: 2(-1.7,0) 3(0,0) 4(1.7,0) 5(3.4,0)
  silkscreen extent -5.3,-2.1 5.3,2.8, body extent -5.35,-2.15 5.35,2.85, height 19.6
TQ144_L [mm] "Thin QFP, 144-Leads, Body 20x20mm, Pitch 0.5mm, IPC High Density"
  oval 1.778x0.25 smd: 1(-10.525,8.75) 2(-10.525,8.25) 3(-10.525,7.75) 4(-10.525,7.25) 5(-10.525,6.75) 6(-10.525,6.25) 7(-10.525,5.75) 8(-10.525,5.25) 9(-10.525,4.75) 10(-10.525,4.25) 11(-10.525,3.75) 12(-10.525,3.25) 13(-10.525,2.75) 14(-10.525,2.25) 15(-10.525,1.75) 16(-10.525,1.25) 17(-10.525,0.75) 18(-10.525,0.25) 19(-10.525,-0.25) 20(-10.525,-0.75) 21(-10.525,-1.25) 22(-10.525,-1.75) 23(-10.525,-2.25) 24(-10.525,-2.75) 25(-10.525,-3.25) 26(-10.525,-3.75) 27(-10.525,-4.25) 28(-10.525,-4.75) 29(-10.525,-5.25) 30(-10.525,-5.75) 31(-10.525,-6.25) 32(-10.525,-6.75) 33(-10.525,-7.25) 34(-10.525,-7.75) 35(-10.525,-8.25) 36(-10.525,-8.75) 73(10.525,-8.75) 74(10.525,-8.25) 75(10.525,-7.75) 76(10.525,-7.25) 77(10.525,-6.75) 78(10.525,-6.25) 79(10.525,-5.75) 80(10.525,-5.25) 81(10.525,-4.75) 82(10.525,-4.25) 83(10.525,-3.75) 84(10.525,-3.25) 85(10.525,-2.75) 86(10.525,-2.25) 87(10.525,-1.75) 88(10.525,-1.25) 89(10.525,-0.75) 90(10.525,-0.25) 91(10.525,0.25) 92(10.525,0.75) 93(10.525,1.25) 94(10.525,1.75) 95(10.525,2.25) 96(10.525,2.75) 97(10.525,3.25) 98(10.525,3.75) 99(10.525,4.25) 100(10.525,4.75) 101(10.525,5.25) 102(10.525,5.75) 103(10.525,6.25) 104(10.525,6.75) 105(10.525,7.25) 106(10.525,7.75) 107(10.525,8.25) 108(10.525,8.75)
  oval 0.25x1.778 smd: 37(-8.75,-10.525) 38(-8.25,-10.525) 39(-7.75,-10.525) 40(-7.25,-10.525) 41(-6.75,-10.525) 42(-6.25,-10.525) 43(-5.75,-10.525) 44(-5.25,-10.525) 45(-4.75,-10.525) 46(-4.25,-10.525) 47(-3.75,-10.525) 48(-3.25,-10.525) 49(-2.75,-10.525) 50(-2.25,-10.525) 51(-1.75,-10.525) 52(-1.25,-10.525) 53(-0.75,-10.525) 54(-0.25,-10.525) 55(0.25,-10.525) 56(0.75,-10.525) 57(1.25,-10.525) 58(1.75,-10.525) 59(2.25,-10.525) 60(2.75,-10.525) 61(3.25,-10.525) 62(3.75,-10.525) 63(4.25,-10.525) 64(4.75,-10.525) 65(5.25,-10.525) 66(5.75,-10.525) 67(6.25,-10.525) 68(6.75,-10.525) 69(7.25,-10.525) 70(7.75,-10.525) 71(8.25,-10.525) 72(8.75,-10.525) 109(8.75,10.525) 110(8.25,10.525) 111(7.75,10.525) 112(7.25,10.525) 113(6.75,10.525) 114(6.25,10.525) 115(5.75,10.525) 116(5.25,10.525) 117(4.75,10.525) 118(4.25,10.525) 119(3.75,10.525) 120(3.25,10.525) 121(2.75,10.525) 122(2.25,10.525) 123(1.75,10.525) 124(1.25,10.525) 125(0.75,10.525) 126(0.25,10.525) 127(-0.25,10.525) 128(-0.75,10.525) 129(-1.25,10.525) 130(-1.75,10.525) 131(-2.25,10.525) 132(-2.75,10.525) 133(-3.25,10.525) 134(-3.75,10.525) 135(-4.25,10.525) 136(-4.75,10.525) 137(-5.25,10.525) 138(-5.75,10.525) 139(-6.25,10.525) 140(-6.75,10.525) 141(-7.25,10.525) 142(-7.75,10.525) 143(-8.25,10.525) 144(-8.75,10.525)
  silkscreen extent -10.65,-9.35 9.35,9.55, body extent -10,-10 10,10, height 1.6
US1M [mm] "Molded Diode, 2-Leads, Body 4.3x2.6mm, IPC Medium Density"
  rect 2.5x1.7 smd: 1(-2,0) 2(2,0)
  silkscreen extent -2.3,-1.5 3.07,1.52, body extent -2.3,-1.46 2.3,1.46, height 2.3
VO20_N [mm] "TSOP, 20-Leads, Body 6.5x4.4mm, Pitch 0.65mm, IPC Medium Density"
  oval 1.7x0.35 smd: 1(-2.85,2.925) 2(-2.85,2.275) 3(-2.85,1.625) 4(-2.85,0.975) 5(-2.85,0.325) 6(-2.85,-0.325) 7(-2.85,-0.975) 8(-2.85,-1.625) 9(-2.85,-2.275) 10(-2.85,-2.925) 11(2.85,-2.925) 12(2.85,-2.275) 13(2.85,-1.625) 14(2.85,-0.975) 15(2.85,-0.325) 16(2.85,0.325) 17(2.85,0.975) 18(2.85,1.625) 19(2.85,2.275) 20(2.85,2.925)
  silkscreen extent -2.97,-3.3 1.6,3.77, body extent -2.25,-3.3 2.25,3.3, height 1.2

## Part data
C1 C2 C3 C4 C5 C6 C8 C9 C10 C11 C12 C13 C14 C15_drivermotor1 C15_drivermotor2 C15_drivermotor3 C15_drivermotor4 C16 C17 C18 C19 C20 C21 C22 C23 C24 C25 C26 C27 C28 C29 C30 C31 C32 C33 C34 C35 C36 C37 C38 C39 C44 C45 C46 C47 C48 C49 C50 C51 C52 C53 C54 C55 C56 C57 C58 C59 C60 C61 C62 C63 C64 C65 C66 C67 C68 C69 C70: "Capacitor"
C40 C41 C42 C43: library part Cap, "Capacitor"
D1 D3 D4: "Silicon Zener Diode (3W)"
D2 D5 D6 D7 D8 LED1_LED1 LED1_LED2 LED1_LED3 LED1_LED4 LED1_LED5 LED1_LED6 LED1_LED7: "1 Amp General Purpose Rectifier"
DS1: library part "7Seg Blue-CC_1", "14.2 mm General Purpose Blue 7-Segment Display: CC, RH DP, Gray Surface"
FT1: "Header, 7-Pin, Dual row, Right Angle"
IR1 P1: library part "Header 3", "Header, 3-Pin"
IR2 Jumper_BUZ1: "Header, 2-Pin"
LS1: "Magnetic Transducer Buzzer"
madarshoot1: "Header, 5-Pin"
P2 POWER_SP1 Programmer1: "Header, 3-Pin, Dual row"
Q1 Q2 Q3_LED1 Q3_LED2 Q3_LED3 Q3_LED4 Q3_LED5 Q3_LED6 Q3_LED7 Q4: "NPN Bipolar Transistor"
R1 R2 R3 R4 R5 R6 R7 R8 R9 R10 R11 R12 R15 R16 R18 R19 R20 R21 R22 R23_drivermotor1 R23_drivermotor2 R23_drivermotor3 R23_drivermotor4 R24_drivermotor1 R24_drivermotor2 R24_drivermotor3 R24_drivermotor4 R25_drivermotor1 R25_drivermotor2 R25_drivermotor3 R25_drivermotor4 R26_drivermotor1 R26_drivermotor2 R26_drivermotor3 R26_drivermotor4 R27_drivermotor1 R27_drivermotor2 R27_drivermotor3 R27_drivermotor4 R28_drivermotor1 R28_drivermotor2 R28_drivermotor3 R28_drivermotor4 R29 R30 R31 R32 R33_LED1 R33_LED2 R33_LED3 R33_LED4 R33_LED5 R33_LED6 R33_LED7 R34_LED1 R34_LED2 R34_LED3 R34_LED4 R34_LED5 R34_LED6 R34_LED7 R35 R36 R37 R38 R39 R40 R45 R46 R47 R48 R49 R50 R51 R52 R53 R54 R55: "Semiconductor Resistor"
R17: library part Res, "Semiconductor Resistor"
R41 R42: library part Res3, "Resistor"
R43 R44: library part Res1, "Resistor"
Reset1 Reset-FPGA S2 S5: "Single-Pole, Single-Throw Switch"
S3 S4: "SPDT Subminiature Toggle Switch, Right Angle Mounting, Vertical Actuation"
S6: "DIP Switch, 4 Position, SPST"
S7: "DIP Switch, 2 Position, SPST"
SPIN_BACK1: "Header, 5-Pin, Dual row"
U1: "8/16-bit AVR XMEGA A3 Microcontroller, 1.6-3.6V, 64KB + 4KB Flash, 2KB EEPROM, 4KB SRAM, 64-pin TQFP, Industrial Grade (-40°C to 85°C), Pb-Free"
U3 U4: library part LM1117DT-3.3, "800mA Low-Dropout Linear Regulator, 3-pin TO-252"
U5: "800mA Low-Dropout Linear Regulator, 3-pin TO-252"
U7: "SIMPLE SWITCHER; 3A Step-Down Voltage Regulator"
U9: "Spartan-3 1.2V FPGA, 97 User I/Os, 144-Pin TQFP, Standard Performance, Commercial Grade"
U10: "Octal Buffer/Line Driver with 3-State Output"
U11: "XCF00S Series, Platform Flash In-System Programmable Configuration 3.3V PROM, 20-Pin TSOP, 4-Megabit, Commercial Grade"
VR1: "Tapped Resistor"

## Free pads (board coordinates)
  round 7 hole 3.2: 0(-22,31) 0(-19.558,-65.989) 0(19.558,-65.989) 0(22,31)

## Via types
v1: diameter 1.27, hole 0.711, Top Layer to Bottom Layer, 228 vias
v2: diameter 1, hole 0.5, Top Layer to Bottom Layer, 16 vias
v3: diameter 2, hole 1, Top Layer to Bottom Layer, 11 vias
v4: diameter 0.8, hole 0.5, Top Layer to Bottom Layer, 5 vias
v5: diameter 1, hole 0.7, Top Layer to Bottom Layer, 5 vias
v6: diameter 1.2, hole 0.6, Top Layer to Bottom Layer, 3 vias
v7: diameter 1.778, hole 0.965, Top Layer to Bottom Layer, 2 vias
v8: diameter 1, hole 0.6, Top Layer to Bottom Layer, 2 vias
v9: diameter 0.9, hole 0.5, Top Layer to Bottom Layer, 1 vias
v10: diameter 0.7, hole 0.45, Top Layer to Bottom Layer, 1 vias
v11: diameter 1.2, hole 0.9, Top Layer to Bottom Layer, 1 vias
v12: diameter 0.8, hole 0.4, Top Layer to Bottom Layer, 1 vias
v13: diameter 1.1, hole 0.711, Top Layer to Bottom Layer, 1 vias

## Nets (pads, with @x,y where several pads share a name; then routed paths per layer and width w, separated by ;. In a path a pad name is that pad's centre, name@x,y a point inside that pad or via, vN(x,y) a via of type N, cw(c..) or ccw(c..) an arc to the next point about the centre after c; other vN are vias at no path point)
1.2V: C20.2 C21.2 C45.2 C46.2 C47.2 C48.2 C49.2 D3.1 U4.4 U9.49 U9.61 U9.121 U9.133 | length 103.7
  Top Layer w0.254: U9.61@-4.342,1.711 -4.342,-3.669 ; v1@-4.222,-4.136 ccw(c-4.678,-4.005) -4.342,-3.669 ; v1@-3.875,-3.789 cw(c-4.007,-3.333) -4.342,-3.669 ; U9.121@-3.835,-19.355 -3.835,-15.265 -3.15,-14.58 -1.676,-14.58 v1@-1.372,-14.884 ; v1(-3.734,-4.277) -4.342,-3.669 ; -2.721,-14.58 cw(c-2.721,-15.979) v1@-1.731,-14.99 ; -2.475,-14.58 ccw(c-2.475,-13.527) v1@-1.731,-14.271 ; -2.107,-14.58 cw(c-2.107,-15.366) v1@-1.551,-14.81 ; v1@-1.346,-14.554 1.346,-14.554 2.158,-15.366 U9.133@2.158,-19.339 ; v1@-1.192,-14.81 cw(c-0.574,-15.428) -0.574,-14.554 ; v1@-1.012,-14.99 cw(c0.039,-16.041) 0.039,-14.554 ; v1@-1.012,-14.271 ccw(c-0.329,-13.588) -0.329,-14.554 ; v1(0.864,-4.252) 1.658,-3.458 ; v1@0.896,-3.745 ccw(c0.959,-2.76) 1.658,-3.458 ; v1@1.371,-4.219 cw(c2.356,-4.156) 1.658,-3.458 ; U9.49@1.658,1.711 1.658,-3.458
  Top Layer w0.8: U4.4@0.322,-33.066 7.108,-33.066 v1@7.163,-33.122 ; U4.4@1.338,-33.632 cw(c2.704,-34.998) 2.704,-33.066 cw(c2.704,-31.135) U4.4@1.338,-32.501 ; U4.4@1.94,-33.271 ccw(c1.75,-32.56) v1@2.387,-32.928 ; 6.361,-33.066 cw(c6.361,-33.822) v1@6.895,-33.288
  Bottom Layer w0.635: v1(-3.734,-4.277) -3.708,-4.252 -1.422,-4.252 0.803,-4.252 v1(0.864,-4.252) ; C45.2@-3.509,-4.502 cw(c-2.906,-5.105) -2.906,-4.252 ; C45.2@-3.509,-4.053 ccw(c-3.029,-3.572) C45.2@-3.029,-4.252 ; C45.2@-3.399,-4.487 cw(c-2.831,-5.055) -2.831,-4.252 cw(c-2.831,-3.449) C45.2@-3.399,-4.017 ; C46.2@0.528,-4.487 ccw(c-0.039,-5.055) -0.039,-4.252 ccw(c-0.039,-3.449) C46.2@0.528,-4.017 ; C46.2@0.639,-4.477 ccw(c0.097,-5.019) 0.097,-4.252 ccw(c0.097,-3.485) C46.2@0.639,-4.027
  Bottom Layer w0.75: C48.2@-1.632,-11.318 cw(c-2.138,-11.824) -1.422,-11.824 ; C48.2@-1.632,-10.729 ccw(c-2.138,-10.223) -1.422,-10.223 ; -1.422,-15.381 cw(c-0.621,-15.381) v1@-1.188,-14.814 ; -1.422,-13.88 ccw(c-0.621,-13.88) v1@-1.188,-14.447 ; -1.422,-4.252 -1.422,-13.411 ; -0.644,-13.411 cw(c-0.644,-14.3) C49.2@-0.015,-13.672 ; C49.2@0.574,-13.672 cw(c1.203,-14.3) 1.203,-13.411 ; 1.297,-13.411 cw(c1.297,-14.214) C47.2@1.865,-13.646 ; C47.2@2.235,-13.513 2.134,-13.411 -1.422,-13.411 ; v1(7.061,-33.122) 7.341,-33.122 8.91,-31.552 ccw(c7.609,-30.251) 9.449,-30.251 9.449,-21.107 7.849,-19.507 0.559,-19.507 -1.422,-17.526 -1.422,-13.411 ; v1@7.061,-32.862 ccw(c7.061,-31.559) 7.982,-32.48
  Bottom Layer w0.8: C45.2@-3.734,-4.252 C45.2@-3.708,-4.252 ; C46.2@0.803,-4.252 C46.2@0.813,-4.242 ; C47.2@2.134,-13.411 C47.2@2.184,-13.411
  other v1: -0.686,-33.757 2.591,-33.045 -0.686,-32.233 -1.372,-14.63
1A: DS1.6 U10.11 | length 17.2
  Top Layer w0.4: U10.11@39.677,-10.871 DS1.6@54.635,-10.871 ; U10.11@40.708,-11.003 cw(c41.026,-11.32) 41.026,-10.871 ; 53.377,-10.871 ccw(c53.377,-9.609) DS1.6@54.27,-10.501 ; 53.455,-10.871 cw(c53.455,-12.023) DS1.6@54.27,-11.209
  Top Layer w0.6: U10.11@39.652,-10.897 U10.11@39.677,-10.871
1B: DS1.5 U10.16 | length 17.1
  Top Layer w0.5: U10.16@39.652,-4.547 53.518,-4.547 DS1.5@54.61,-5.639 ; 53.689,-4.718 ccw(c54.623,-3.784) DS1.5@54.623,-5.105 ; 53.924,-4.952 cw(c53.321,-5.555) DS1.5@54.173,-5.555
1C: DS1.3 U10.17 | length 21.8
  Top Layer w0.5: U10.17@39.652,-3.277 57.252,-3.277 58.547,-4.572 ; DS1.3@58.305,-5.237 ccw(c57.721,-4.653) 58.547,-4.653 ; DS1.3@58.547,-5.613 58.547,-4.572 ; DS1.3@58.873,-5.181 cw(c59.278,-4.572) 58.547,-4.572
1D: DS1.10 U10.15 | length 31.1
  Top Layer w0.4: U10.15@39.652,-5.817 v1@51.918,-5.817 ; U10.15@40.708,-5.923 cw(c40.964,-6.179) 40.964,-5.817 cw(c40.964,-5.454) U10.15@40.708,-5.711 ; 50.648,-5.817 cw(c50.648,-7.214) v1@51.635,-6.226 ; 51.138,-5.817 ccw(c51.138,-5.113) v1@51.635,-5.611
  Bottom Layer w0.4: v1@51.943,-6.353 cw(c51.943,-7.035) 52.425,-6.553 ; v1(51.943,-5.918) 51.791,-5.918 55.194,-9.322 61.036,-9.322 DS1.10@62.636,-10.922 ; v1@52.378,-5.918 ccw(c53.796,-5.918) 52.793,-6.921 ; 61.678,-9.963 ccw(c62.623,-9.018) DS1.10@62.623,-10.355 ; 61.808,-10.093 cw(c61.046,-10.855) DS1.10@62.123,-10.855
1DP: DS1.2 U10.18 | length 25.1
  Top Layer w0.508: U10.18@39.652,-2.007 58.42,-2.007 60.63,-4.216 60.63,-5.486 DS1.2@60.477,-5.639 ; DS1.2@60.308,-5.24 ccw(c59.531,-4.462) 60.63,-4.462 ; 60.63,-4.494 ccw(c61.684,-4.494) DS1.2@60.939,-5.24
1E: DS1.9 U10.14 | length 25.4
  Top Layer w0.4: U10.14@39.652,-7.087 57.074,-7.087 DS1.9@60.833,-10.846 ; U10.14@40.708,-7.193 cw(c40.964,-7.449) 40.964,-7.087 cw(c40.964,-6.724) U10.14@40.708,-6.981 ; 59.615,-9.628 cw(c58.387,-10.855) DS1.9@60.123,-10.855 ; 60.143,-10.156 ccw(c60.623,-9.677) DS1.9@60.623,-10.355
  Top Layer w0.5: DS1.9@60.833,-11.024 DS1.9@60.833,-10.846
1F: DS1.7 U10.12 | length 20
  Top Layer w0.4: U10.12@39.652,-9.627 39.703,-9.677 55.651,-9.677 ; U10.12@40.708,-9.521 ccw(c41.087,-9.142) 41.087,-9.677 ; 56.121,-10.147 ccw(c56.623,-9.645) DS1.7@56.623,-10.355 ; DS1.7@56.123,-10.846 ccw(c54.512,-10.817) 55.651,-9.677 ; DS1.7@56.642,-10.668 55.651,-9.677
  Top Layer w0.5: DS1.7@56.642,-10.998 DS1.7@56.642,-10.668
1G: DS1.8 U10.13 | length 22.7
  Top Layer w0.4: U10.13@39.652,-8.357 56.185,-8.357 DS1.8@58.801,-10.973 ; U10.13@40.708,-8.463 cw(c40.964,-8.719) 40.964,-8.357 cw(c40.964,-7.994) U10.13@40.708,-8.251 ; 57.727,-9.899 cw(c56.771,-10.855) DS1.8@58.123,-10.855 ; 57.872,-10.044 ccw(c58.623,-9.293) DS1.8@58.623,-10.355
2.5V: C17.2 C18.2 C62.2 C63.2 C64.2 C65.2 C66.2 D1.1 U3.4 U9.48 U9.62 U9.120 U9.134 | length 147.2
  Top Layer w0.254: v1(-5.867,-4.277) -4.842,-3.252 U9.62@-4.842,1.711 ; v1@-5.867,-3.769 ccw(c-5.867,-2.543) -5,-3.41 ccw(c-4.133,-4.277) v1@-5.359,-4.277 ; v1@-5.156,-13.487 -4.342,-14.301 ; v1@-5.131,-13.97 cw(c-5.131,-15.074) -4.35,-14.293 ; v1@-4.625,-13.511 ccw(c-3.648,-13.607) -4.342,-14.301 ; -4.369,-13.604 -4.242,-13.477 ; U9.120@-4.342,-19.339 -4.342,-14.301 ; 2.158,-3.723 ccw(c3.196,-3.723) v1@2.462,-4.457 ; 2.158,-3.109 ccw(c3.81,-3.109) v1(2.642,-4.277) 2.158,-3.794 ; 2.158,-2.496 ccw(c4.423,-2.496) v1@2.821,-4.098 ; 2.158,-1.883 ccw(c5.036,-1.883) v1@3.001,-3.918 ; U9.48@2.158,1.711 2.158,-3.794 ; v1@2.194,-4.037 ccw(c2.012,-3.94) 2.158,-3.794 ; v1@2.402,-3.83 cw(c2.304,-3.647) 2.158,-3.794 ; 2.616,-13.477 2.658,-13.519 U9.134@2.658,-19.339
  Top Layer w0.635: v1(-9.703,-17.043) -6.137,-13.477 -4.242,-13.477 2.616,-13.477 v1(3.937,-13.477) ; v1@-9.703,-16.726 ccw(c-9.703,-15.959) -9.161,-16.501 ccw(c-8.619,-17.043) v1@-9.385,-17.043 ; -5.934,-13.477 ccw(c-5.934,-12.659) v1@-5.355,-13.237 ; -5.861,-13.477 cw(c-5.861,-14.192) v1@-5.355,-13.687 ; v1@3.712,-13.702 ccw(c3.17,-14.244) 3.17,-13.477 ccw(c3.17,-12.711) v1@3.712,-13.253 ; v1@-4.906,-13.687 cw(c-4.401,-14.192) -4.401,-13.477 ; v1@-4.906,-13.687 cw(c-4.401,-14.192) -4.401,-13.477 ; v1@-4.906,-13.687 cw(c-4.401,-14.192) -4.401,-13.477 ; v1@-4.906,-13.237 ccw(c-4.328,-12.659) -4.328,-13.477 ; v1@-4.906,-13.237 ccw(c-4.328,-12.659) -4.328,-13.477 ; v1@-4.906,-13.237 ccw(c-4.328,-12.659) -4.328,-13.477
  Top Layer w0.75: -19.153,-35.076 ccw(c-17.394,-33.317) U3.4@-17.394,-35.805 ; -19.133,-35.096 cw(c-20.791,-36.754) U3.4@-18.446,-36.754 ; -18.657,-35.572 cw(c-19.714,-36.63) U3.4@-18.219,-36.63 ; U3.4@-18.325,-35.904 cw(c-19.809,-37.389) U3.4@-17.71,-37.389 ; U3.4@-18.026,-36.959 cw(c-17.652,-37.438) -17.221,-37.008 -21.387,-32.842 -21.387,-26.289 -18.059,-22.962 -14.808,-22.962 v1(-11.125,-19.279) ; U3.4@-17.399,-36.624 U3.4@-17.118,-36.905
  Bottom Layer w0.635: C62.2@2.642,-4.595 cw(c2.642,-5.361) 3.184,-4.819 cw(c3.726,-4.277) C62.2@2.959,-4.277 ; v1(2.642,-4.277) 3.937,-5.573 v1(3.937,-13.477) ; C62.2@3.074,-4.252 ccw(c4.18,-4.252) 3.398,-5.034 ; C64.2@3.702,-13.242 ccw(c3.134,-12.674) 3.937,-12.674 ccw(c4.74,-12.674) C64.2@4.172,-13.242 ; C64.2@3.712,-13.253 ccw(c3.17,-12.711) 3.937,-12.711 ccw(c4.704,-12.711) C64.2@4.162,-13.253
  Bottom Layer w0.75: v1@-10.973,-19.304 -10.973,-18.694 -9.69,-17.412 v1@-9.69,-17.056 ; v1@-10.865,-19.279 cw(c-9.195,-19.279) -10.376,-18.098 ; -10.416,-18.138 ccw(c-11.51,-17.043) v1@-9.963,-17.043 ; C63.2@-6.062,-4.446 cw(c-6.531,-4.916) -5.867,-4.916 cw(c-5.203,-4.916) C63.2@-5.673,-4.446 ; C66.2@-5.867,-13.087 ccw(c-4.841,-13.087) C66.2@-5.567,-13.813 ; C66.2@-5.867,-12.867 ccw(c-4.535,-12.867) C66.2@-5.477,-13.808 ; -5.867,-11.276 ccw(c-3.03,-11.276) C66.2@-5.036,-13.283 ; -5.867,-11.056 ccw(c-2.725,-11.056) C66.2@-4.947,-13.278 ; C63.2@-5.867,-4.252 v1(-5.867,-4.277) -5.867,-13.36 C66.2@-5.791,-13.437 ; -5.503,-12.474 cw(c-6.554,-13.081) C66.2@-5.382,-13.395
  Bottom Layer w1: C17.2@-20.918,-35.117 -19.586,-36.449 C18.2@-19.521,-36.449 ; C18.2@-19.451,-36.582 cw(c-19.451,-39.588) v1@-17.325,-37.462 ; C18.2@-19.344,-36.326 ccw(c-18.557,-35.539) v1@-18.557,-36.652 ; v1@-17.552,-37.477 ccw(c-19.355,-39.035) -19.355,-36.652 -18.136,-36.652 -15.901,-38.887 D1.1@-15.265,-38.887 cw(c-15.265,-37.501) v1@-16.538,-38.047 ; v1@-17.319,-37.354 ccw(c-16.442,-37.119) v1@-16.896,-37.906 ; v1@-16.863,-37.924 ccw(c-15.353,-36.414) D1.1@-15.353,-38.55 ; C65.2@-7.686,-13.538 -5.156,-13.538 C66.2@-5.105,-13.487
  other v1: -16.662,-38.1 -17.45,-37.389 -18.186,-36.754 -5.131,-13.462